# Altium PCB main_pcb_v0.PcbDoc (part 2 of 2)
Units mil, origin at the board's own origin, x right, y up, seen from the top; angles counter-clockwise.
Board outline 8090 x 4600 mil, 2 copper layers (Top Layer, Bottom Layer); 81 components, 148 nets, 565 pads, 37 vias.
Unrouted connection lines stored in the file: 2.
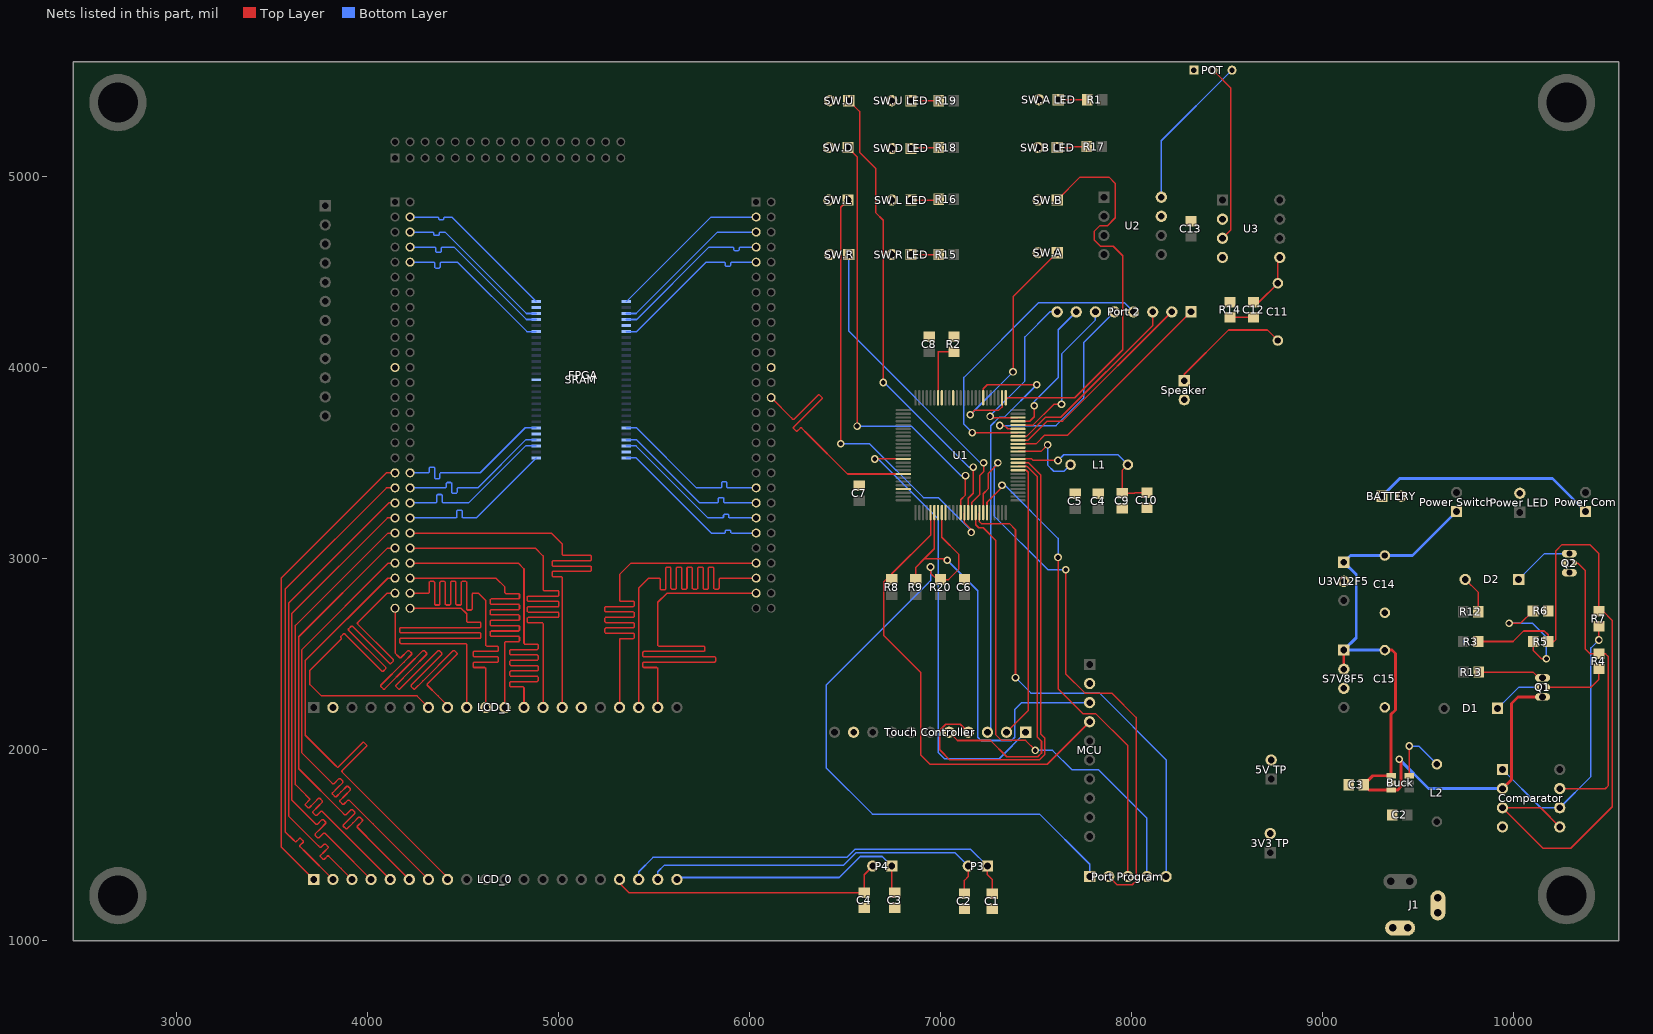
[diagram p2: the nets of this part, all layers, seen from the top]

## Via types
v1: diameter 40, hole 25, Top Layer to Bottom Layer, 37 vias

## Nets (pads, with @x,y where several pads share a name; then routed paths per layer and width w, separated by ;. In a path a pad name is that pad's centre, name@x,y a point inside that pad or via, vN(x,y) a via of type N, cw(c..) or ccw(c..) an arc to the next point about the centre after c; other vN are vias at no path point) (continued)
FPGA_SS: FPGA.116 U1.68 | length 1282.2
  Top Layer w8: FPGA.116@6113.74,3841.34 6220,3735.08 6226.93,3728.15 6232.87,3728.15 6360.25,3855.53 6366.19,3855.53 6380.05,3841.68 6380.05,3835.74 6249.7,3705.38 6230.31,3685.99 6230.31,3680.05 6244.17,3666.19 6250.11,3666.19 6266.53,3682.61 6272.47,3682.61 6305.04,3650.04 6513.51,3441.57 U1.68@6804.8,3441.57
GND: "3V3 TP.2" "5V TP.2" "Power LED.2" "SW.A LED.2" "SW.B LED.2" "SW.D LED.2" "SW.L LED.2" "SW.R LED.2" "SW.U LED.2" "Touch Controller.10" BATTERY.2 Buck.2 C1.1 C2.1 C3.1 C4.1 C5.1 C6.2 C7.1 C8.1 C9.1 C10.1 C13.2 C14.2 C15.2 Comparator.4 FPGA.23 FPGA.112 J1.2 J1.2A J1.2B J1.3 J1.3A J1.3B LCD_1.2 LCD_1.15 MCU.2 POT.1 Q2.3 R2.2 R6.1 R14.1 S7V8F5.3 Speaker.2 SRAM.5 SRAM.26 SRAM.32 SRAM.41 SRAM.53 SW.A.2 SW.B.2 SW.D.2 SW.L.2 SW.R.2 SW.U.2 U1.15 U1.40 U1.43 U1.72 U1.82 U1.84 U2.7 U3.2 U3.4 U3V12F5.2
GREEN0: FPGA.53 LCD_1.7 | length 2486.9
  Top Layer w8: FPGA.53@4145.24,2817.72 4103.35,2817.72 3955.63,2670 3948.7,2663.07 3948.7,2657.13 4136.82,2469.01 4136.82,2463.07 4122.96,2449.21 4117.02,2449.21 3925.93,2640.3 3921.41,2644.82 3915.47,2644.82 3901.61,2630.97 3901.61,2625.03 3906.13,2620.5 4097.22,2429.41 4097.22,2423.47 4083.37,2409.61 4077.43,2409.61 3886.33,2600.7 3881.81,2605.23 3875.87,2605.23 3862.01,2591.37 3862.01,2585.43 3863.56,2583.87 3863.56,2577.93 3700,2414.37 3700,2340 3760,2280 4260,2280 LCD_1.7@4320,2220 LCD_1.7@4305,2220
GREEN1: FPGA.55 LCD_1.8 | length 2473.5
  Top Layer w8: FPGA.55@4145.24,2738.98 4145.24,2504.76 4162.5,2487.5 4169.43,2480.57 4175.37,2480.57 4212.45,2517.65 4218.39,2517.65 4232.25,2503.79 4232.25,2497.85 4192.2,2457.8 4070.55,2336.15 4070.55,2330.21 4084.41,2316.35 4090.35,2316.35 4212,2438 4291.64,2517.65 4297.58,2517.65 4311.44,2503.79 4311.44,2497.85 4231.8,2418.2 4149.74,2336.15 4149.74,2330.21 4163.6,2316.35 4169.54,2316.35 4251.6,2398.4 4370.84,2517.65 4376.78,2517.65 4390.64,2503.79 4390.64,2497.85 4271.39,2378.61 4228.94,2336.15 4228.94,2330.21 4242.8,2316.35 4248.74,2316.35 4291.19,2358.81 4450.03,2517.65 4455.97,2517.65 4469.83,2503.79 4469.83,2497.85 4313.96,2341.98 4313.96,2336.04 4370,2280 4420,2230 LCD_1.8@4420,2220
GREEN2: FPGA.56 LCD_1.9 | length 2471.5
  Top Layer w8: FPGA.56@4223.98,2738.98 4491.02,2738.98 4520,2710 4520,2680 4520,2670.2 4524.2,2666 4590.67,2666 4594.87,2661.8 4594.87,2642.2 4590.67,2638 4520,2638 4174.56,2638 4170.36,2633.8 4170.36,2614.2 4174.56,2610 4520,2610 4590.67,2610 4594.87,2605.8 4594.87,2586.2 4590.67,2582 4520,2582 4174.56,2582 4170.36,2577.8 4170.36,2558.2 4174.56,2554 4515.8,2554 4520,2549.8 4520,2470 LCD_1.9@4520,2220
GREEN3: FPGA.54 LCD_1.10 | length 2471.5
  Top Layer w8: FPGA.54@4223.98,2817.72 4310,2817.72 4319.8,2817.72 4324,2821.92 4324,2875.26 4328.2,2879.46 4347.8,2879.46 4352,2875.26 4352,2817.72 4352,2760.18 4356.2,2755.98 4375.8,2755.98 4380,2760.18 4380,2817.72 4380,2875.26 4384.2,2879.46 4403.8,2879.46 4408,2875.26 4408,2817.72 4408,2760.18 4412.2,2755.98 4431.8,2755.98 4436,2760.18 4436,2817.72 4436,2875.26 4440.2,2879.46 4459.8,2879.46 4464,2875.26 4464,2817.72 4464,2760.18 4468.2,2755.98 4487.8,2755.98 4492,2760.18 4492,2817.72 4492,2875.26 4496.2,2879.46 4515.8,2879.46 4520,2875.26 4520,2817.72 4520,2734.04 4524.2,2729.84 4543.8,2729.84 4548,2734.04 4548,2813.52 4552.2,2817.72 4555,2817.72 4582.28,2817.72 4620,2780 4620,2555 4620,2545.2 4624.2,2541 4681.87,2541 4686.07,2536.8 4686.07,2517.2 4681.87,2513 4620,2513 4558.13,2513 4553.93,2508.8 4553.93,2489.2 4558.13,2485 4620,2485 4681.87,2485 4686.07,2480.8 4686.07,2461.2 4681.87,2457 4620,2457 4558.13,2457 4553.93,2452.8 4553.93,2433.2 4558.13,2429 4615.8,2429 4620,2424.8 4620,2365 LCD_1.10@4620,2220
GREEN4: FPGA.52 LCD_1.11 | length 2471.5
  Top Layer w8: FPGA.52@4223.98,2896.46 4673.54,2896.46 4720,2850 4720,2830 4720,2820.2 4724.2,2816 4792.21,2816 4796.41,2811.8 4796.41,2792.2 4792.21,2788 4720,2788 4647.79,2788 4643.59,2783.8 4643.59,2764.2 4647.79,2760 4720,2760 4792.21,2760 4796.41,2755.8 4796.41,2736.2 4792.21,2732 4720,2732 4647.79,2732 4643.59,2727.8 4643.59,2708.2 4647.79,2704 4720,2704 4792.21,2704 4796.41,2699.8 4796.41,2680.2 4792.21,2676 4720,2676 4647.79,2676 4643.59,2671.8 4643.59,2652.2 4647.79,2648 4720,2648 4792.21,2648 4796.41,2643.8 4796.41,2624.2 4792.21,2620 4720,2620 4647.79,2620 4643.59,2615.8 4643.59,2596.2 4647.79,2592 4720,2592 4792.21,2592 4796.41,2587.8 4796.41,2568.2 4792.21,2564 4724.2,2564 4720,2559.8 4720,2465 LCD_1.11@4720,2220
GREEN5: FPGA.50 LCD_1.12 | length 2471.5
  Top Layer w8: FPGA.50@4223.98,2975.2 4789.8,2975.2 4820,2945 4820,2565 4820,2555.2 4824.2,2551 4889.69,2551 4893.89,2546.8 4893.89,2527.2 4889.69,2523 4820,2523 4750.31,2523 4746.11,2518.8 4746.11,2499.2 4750.31,2495 4820,2495 4889.69,2495 4893.89,2490.8 4893.89,2471.2 4889.69,2467 4820,2467 4750.31,2467 4746.11,2462.8 4746.11,2443.2 4750.31,2439 4820,2439 4889.69,2439 4893.89,2434.8 4893.89,2415.2 4889.69,2411 4820,2411 4750.31,2411 4746.11,2406.8 4746.11,2387.2 4750.31,2383 4820,2383 4889.69,2383 4893.89,2378.8 4893.89,2359.2 4889.69,2355 4820,2355 4750.31,2355 4746.11,2350.8 4746.11,2331.2 4750.31,2327 4815.8,2327 4820,2322.8 4820,2270 LCD_1.12@4820,2220
GREEN6: FPGA.48 LCD_1.13 | length 2467.3
  Top Layer w8: FPGA.48@4223.98,3053.94 4878.7,3053.94 4920,3012.64 4920,2845 4920,2835.2 4924.2,2831 4998.8,2831 5003,2826.8 5003,2807.2 4998.8,2803 4920,2803 4841.2,2803 4837,2798.8 4837,2779.2 4841.2,2775 4920,2775 4998.8,2775 5003,2770.8 5003,2751.2 4998.8,2747 4920,2747 4841.2,2747 4837,2742.8 4837,2723.2 4841.2,2719 4920,2719 4998.8,2719 5003,2714.8 5003,2695.2 4998.8,2691 4920,2691 4841.2,2691 4837,2686.8 4837,2667.2 4841.2,2663 4915.8,2663 4920,2658.8 4920,2460 LCD_1.13@4920,2220
GREEN7: FPGA.46 LCD_1.14 | length 2471.5
  Top Layer w8: FPGA.46@4223.98,3132.68 4962.32,3132.68 5020,3075 5020,3030 5020,3020.2 5024.2,3016 5168.44,3016 5172.64,3011.8 5172.64,2992.2 5168.44,2988 5020,2988 4971.56,2988 4967.36,2983.8 4967.36,2964.2 4971.56,2960 5020,2960 5168.44,2960 5172.64,2955.8 5172.64,2936.2 5168.44,2932 5020,2932 4971.56,2932 4967.36,2927.8 4967.36,2908.2 4971.56,2904 5015.8,2904 5020,2899.8 5020,2735 LCD_1.14@5020,2220
HSYNC: FPGA.139 LCD_1.18 | length 2471.5
  Top Layer w8: LCD_1.18@5420,2220 5420,2845 5471.46,2896.46 5528.8,2896.46 5533,2892.26 5533,2839.36 5537.2,2835.16 5556.8,2835.16 5561,2839.36 5561,2896.46 5561,2949.59 5565.2,2953.79 5584.8,2953.79 5589,2949.59 5589,2896.46 5589,2843.33 5593.2,2839.13 5612.8,2839.13 5617,2843.33 5617,2896.46 5617,2949.59 5621.2,2953.79 5640.8,2953.79 5645,2949.59 5645,2896.46 5645,2843.33 5649.2,2839.13 5668.8,2839.13 5673,2843.33 5673,2896.46 5673,2949.59 5677.2,2953.79 5696.8,2953.79 5701,2949.59 5701,2896.46 5701,2843.33 5705.2,2839.13 5724.8,2839.13 5729,2843.33 5729,2896.46 5729,2949.59 5733.2,2953.79 5752.8,2953.79 5757,2949.59 5757,2896.46 5757,2843.33 5761.2,2839.13 5780.8,2839.13 5785,2843.33 5785,2896.46 5785,2949.59 5789.2,2953.79 5808.8,2953.79 5813,2949.59 5813,2896.46 5813,2843.33 5817.2,2839.13 5836.8,2839.13 5841,2843.33 5841,2892.26 5845.2,2896.46 5855,2896.46 FPGA.139@6035,2896.46
IMU_SCL: MCU.3 R9.1 U1.81 | length 2283.8
  Top Layer w8: R9.1@6870,2889.37 6870,2952.8 6915,2997.8 ; U1.81@6967.2,3239.8 6967.2,3050 6915,2997.8 ; v1@7017.19,2988 7019.19,2990 v1(7035,2990) 7027.2,2997.8 6915,2997.8
  Bottom Layer w8: v1(7035,2990) 7195,2830 7195,2064 7212,2047 7371,2047 7388,2064 7388,2209 7424,2245 MCU.3@7780,2245
IMU_SDA: MCU.4 R8.1 U1.80 | length 2464.6
  Top Layer w8: U1.80@6947.52,3239.8 6947.52,3121.52 6745,2919 R8.1@6745,2889.37 6714.37,2889.37 6702,2877 6702,2596 6897,2401 6897,1970 6944,1923 7558,1923 MCU.4@7780,2145
IO0: FPGA.127 SRAM.22 | length 861.8
  Bottom Layer w8: SRAM.22@5356.22,3683.03 5408.15,3683.03 5722.28,3368.9 5840,3368.9 5849.8,3368.9 5854,3373.1 5854,3396.05 5858.2,3400.25 5877.8,3400.25 5882,3396.05 5882,3373.1 5886.2,3368.9 5925,3368.9 FPGA.127@6035,3368.9
IO1: FPGA.129 SRAM.24 | length 861.8
  Bottom Layer w8: SRAM.24@5356.22,3620.04 5410,3620.04 5739.88,3290.16 5823.2,3290.16 5833,3290.16 5837.2,3294.36 5837.2,3314.05 5841.4,3318.25 5861,3318.25 5865.2,3314.05 5865.2,3294.36 5869.4,3290.16 5925,3290.16 FPGA.129@6035,3290.16
IO2: FPGA.131 SRAM.25 | length 861.8
  Bottom Layer w8: SRAM.25@5356.22,3588.54 5406.42,3588.54 5783.54,3211.42 5850,3211.42 5859.8,3211.42 5864,3215.62 5864,3225.53 5868.2,3229.73 5887.8,3229.73 5892,3225.53 5892,3215.62 5896.2,3211.42 5965,3211.42 FPGA.131@6035,3211.42
IO3: FPGA.133 SRAM.27 | length 861.8
  Bottom Layer w8: SRAM.27@5356.22,3525.55 5407.32,3525.55 5800.19,3132.68 5860,3132.68 5869.8,3132.68 5874,3136.88 5874,3143.53 5878.2,3147.73 5897.8,3147.73 5902,3143.53 5902,3136.88 5906.2,3132.68 5965,3132.68 FPGA.133@6035,3132.68
IO4: FPGA.44 SRAM.28 | length 861.8
  Bottom Layer w8: FPGA.44@4223.98,3211.42 4455,3211.42 4464.8,3211.42 4469,3215.62 4469,3248.06 4473.2,3252.26 4492.8,3252.26 4497,3248.06 4497,3215.62 4501.2,3211.42 4510,3211.42 4569.65,3211.42 SRAM.28@4883.78,3525.55
IO5: FPGA.42 SRAM.30 | length 861.8
  Bottom Layer w8: FPGA.42@4223.98,3290.16 4350,3290.16 4359.8,3290.16 4364,3294.36 4364,3330.06 4368.2,3334.26 4387.8,3334.26 4392,3330.06 4392,3294.36 4396.2,3290.16 4500,3290.16 4530.16,3290.16 4828.54,3588.54 SRAM.30@4883.78,3588.54
IO6: FPGA.40 SRAM.31 | length 861.8
  Bottom Layer w8: FPGA.40@4223.98,3368.9 4400,3368.9 4409.8,3368.9 4414,3373.1 4414,3392.87 4418.2,3397.07 4437.8,3397.07 4442,3392.87 4442,3368.9 4442,3344.92 4446.2,3340.72 4465.8,3340.72 4470,3344.92 4470,3364.7 4474.2,3368.9 4505,3368.9 4577.4,3368.9 4828.54,3620.04 SRAM.31@4883.78,3620.04
IO7: FPGA.38 SRAM.33 | length 861.8
  Bottom Layer w8: FPGA.38@4223.98,3447.64 4309.8,3447.64 4319.6,3447.64 4323.8,3451.84 4323.8,3473.24 4328,3477.44 4347.6,3477.44 4351.8,3473.24 4351.8,3447.64 4351.8,3422.03 4356,3417.83 4375.6,3417.83 4379.8,3422.03 4379.8,3443.44 4384,3447.64 4405,3447.64 4591.57,3447.64 4826.97,3683.03 SRAM.33@4883.78,3683.03
IO8: FPGA.10 SRAM.49 | length 861.8
  Bottom Layer w8: FPGA.10@4223.98,4550 4310,4550 4348.8,4550 4353,4545.8 4353,4523.48 4357.2,4519.28 4376.8,4519.28 4381,4523.48 4381,4545.8 4385.2,4550 4395,4550 4472.49,4550 4835.52,4186.97 SRAM.49@4883.78,4186.97
IO9: FPGA.8 SRAM.51 | length 861.8
  Bottom Layer w8: FPGA.8@4223.98,4628.74 4315,4628.74 4353.8,4628.74 4358,4624.54 4358,4605.48 4362.2,4601.28 4381.8,4601.28 4386,4605.48 4386,4624.54 4390.2,4628.74 4400,4628.74 4453.71,4628.74 4832.49,4249.96 SRAM.51@4883.78,4249.96
IO10: FPGA.6 SRAM.52 | length 861.8
  Bottom Layer w8: FPGA.6@4223.98,4707.48 4305,4707.48 4343.8,4707.48 4348,4703.28 4348,4694.01 4352.2,4689.81 4371.8,4689.81 4376,4694.01 4376,4703.28 4380.2,4707.48 4390,4707.48 4406.46,4707.48 4832.49,4281.46 SRAM.52@4883.78,4281.46
IO11: FPGA.4 SRAM.54 | length 859.7
  Bottom Layer w8: FPGA.4@4223.98,4786.22 4295,4786.22 4368.8,4786.22 4373,4782.02 4373,4777.07 4377.2,4772.87 4396.8,4772.87 4401,4777.07 4401,4782.02 4405.2,4786.22 4415,4786.22 4442.01,4786.22 SRAM.54@4883.78,4344.45
IO12: FPGA.91 SRAM.1 | length 861.8
  Bottom Layer w8: SRAM.1@5356.22,4344.45 5797.99,4786.22 FPGA.91@6035,4786.22
IO13: FPGA.93 SRAM.3 | length 855.2
  Bottom Layer w8: SRAM.3@5356.22,4281.46 5406.46,4281.46 5832.48,4707.48 FPGA.93@6035,4707.48
IO14: FPGA.95 SRAM.4 | length 861.8
  Bottom Layer w8: SRAM.4@5356.22,4249.96 5409.96,4249.96 5788.74,4628.74 5875,4628.74 5913.8,4628.74 5918,4624.54 5918,4614.97 5922.2,4610.77 5941.8,4610.77 5946,4614.97 5946,4624.54 5950.2,4628.74 5960,4628.74 FPGA.95@6035,4628.74
IO15: FPGA.97 SRAM.6 | length 861.8
  Bottom Layer w8: SRAM.6@5356.22,4186.97 5409.96,4186.97 5772.99,4550 5855,4550 5868.8,4550 5873,4545.8 5873,4532.97 5877.2,4528.77 5896.8,4528.77 5901,4532.97 5901,4545.8 5905.2,4550 5915,4550 FPGA.97@6035,4550
NetBuck_6: Buck.6 L2.1 | length 340.2
  Top Layer w8: Buck.6@9452.24,1862.4 v1(9452.24,2018.03)
  Bottom Layer w8: v1(9452.24,2018.03) 9501.61,2018.03 L2.1@9597.24,1922.4
NetC9_2: C9.2 C10.2 L1.2 U1.12 | length 905.9
  Top Layer w8: U1.12@7405.2,3520.31 7476.76,3520.31 7484.7,3512.37 v1(7614.68,3512.37) ; L1.2@7980,3490 7950,3460 C9.2@7950,3340 8013,3340 8016.74,3343.74 C10.2@8080,3343.74
  Bottom Layer w8: v1(7614.68,3512.37) 7644.31,3542 7928,3542 L1.2@7980,3490
NetC11_1: C11.1 C12.2 U3.5 | length 308.1
  Top Layer w8: C12.2@8637.44,4340 8665,4340 C11.1@8765,4440 8765,4565 U3.5@8775,4575
NetC11_2: C11.2 Speaker.1 | length 641.9
  Top Layer w8: Speaker.1@8275,3930 8275,3963 8507,4195 8710,4195 C11.2@8765,4140
NetC12_1: C12.1 R14.2 | length 124.6
  Top Layer w8: R14.2@8515,4260.63 8515,4262 8637.44,4262 C12.1@8637.44,4261.26
NetComparator_1: Comparator.1 Comparator.6 R7.2 | length 1418.4
  Top Layer w8: v1(10445,2573) R7.2@10445,2645.63
  Bottom Layer w8: Comparator.1@9940,1895 10140,1695 Comparator.6@10240,1695 10403,1858 10403,2531 v1(10445,2573)
NetComparator_3: Comparator.3 Comparator.5 R3.1 R5.2 R7.1 | length 3657.6
  Top Layer w8: R3.1@9814.37,2565 9996,2565 10051,2620 10159.37,2620 10179.37,2600 R5.2@10179.37,2565 10209,2565 10220,2576 10220,3040 10252,3072 10397,3072 10445,3024 R7.1@10445,2724.37 10465.63,2724.37 10515,2675 10515,1700 10298,1483 10152,1483 Comparator.3@9940,1695 10140,1695 Comparator.5@10240,1595
NetComparator_7: Comparator.7 Q2.2 R4.1 | length 1583.8
  Top Layer w8: Comparator.7@10240,1795 10478,1795 10495,1812 10495,2485 10480,2500 R4.1@10445,2500 10400,2500 10374,2526 10374,2937 10336,2975 Q2.2@10290,2975
NetD1_2: D1.2 Q1.2 R4.2 | length 646.9
  Top Layer w8: Q1.2@10150,2325 10402,2325 10445,2368 R4.2@10445,2421.26
  Bottom Layer w8: D1.2@9914.76,2215 10024.76,2325 Q1.2@10150,2325
NetD2_1: D2.1 R12.2 | length 198.6
  Top Layer w8: D2.1@9745.24,2890 9814.37,2820.87 R12.2@9814.37,2720
NetD2_2: D2.2 Q2.1 | length 321.2
  Bottom Layer w8: D2.2@10024.76,2890 10159.76,3025 Q2.1@10290,3025
"NetPort 2_1": "Port 2.1" U1.16 | length 1191
  Top Layer w8: U1.16@7405.2,3599.05 7499.07,3599.05 7545.02,3645 7665,3645 8310,4290
"NetPort 2_2": "Port 2.2" U1.17 | length 1082.8
  Top Layer w8: U1.17@7405.2,3618.74 7459,3618.74 7558.48,3718.22 7638.22,3718.22 8210,4290
"NetPort 2_3": "Port 2.3" U1.18 | length 1016.3
  Top Layer w8: U1.18@7405.2,3638.42 7449.42,3638.42 7549.08,3738.08 7629.08,3738.08 8110,4219 8110,4290
"NetPort 2_4": "Port 2.4" U1.19 | length 1616.2
  Top Layer w8: v1(7165.89,3658.11) U1.19@7405.2,3658.11
  Bottom Layer w8: v1(7165.89,3658.11) 7122,3702 7122,3947 7513,4338 7962,4338 8010,4290
"NetPort 2_5": "Port 2.5" U1.20 | length 1118.1
  Top Layer w8: v1(7310,3695) 7334,3695 7351.21,3677.79 U1.20@7405.2,3677.79
  Bottom Layer w8: v1(7310,3695) 7604,3695 7748,3839 7748,4128 7910,4290
"NetPort 2_6": "Port 2.6" U1.21 | length 829.5
  Top Layer w8: U1.21@7405.2,3697.48 7483.93,3697.48 7593.45,3807 v1(7633,3807)
  Bottom Layer w8: v1(7633,3807) 7633,4070 7810,4247 7810,4290
"NetPort 2_7": "Port 2.7" U1.22 | length 734.8
  Top Layer w8: U1.22@7405.2,3717.16 7466.22,3717.16 7490,3740.94 v1(7490,3799)
  Bottom Layer w8: v1(7490,3799) 7490,3821 7616,3947 7616,4196 7710,4290
"NetPort 2_8": "Port 2.8" U1.23 | length 863.4
  Top Layer w8: v1(7259,3743) 7265.15,3736.85 U1.23@7405.2,3736.85
  Bottom Layer w8: v1(7259,3743) 7259,3746 7441,3928 7441,4159 7572,4290 7610,4290
NetPOT_2: POT.2 U3.3 | length 936.3
  Top Layer w8: POT.2@8425,5555 8518,5462 8518,4718 U3.3@8475,4675
NetPOT_3: POT.3 U2.8 | length 818.3
  Bottom Layer w8: U2.8@8155,4890 8155,5185 POT.3@8525,5555
NetQ1_1: Q1.1 R13.1 | length 347.4
  Top Layer w8: R13.1@9815,2405 10100,2405 10130,2375 Q1.1@10150,2375
NetR1_2: "SW.A LED.1" R1.2 | length 151.3
  Top Layer w8: 7615,5400 R1.2@7766.26,5400
NetR2_1: R2.1 U1.44 | length 323.6
  Top Layer w8: U1.44@6986.89,3840.2 6986.89,4080.68 6987,4080.79 R2.1@7070,4080.79
NetR5_1: R5.1 R6.2 | length 622.5
  Top Layer w8: v1(9975,2660) 10035,2660 R6.2@10100,2725 ; R5.1@10100.63,2565 10100.63,2519.37 10145,2475 v1(10170,2475)
  Bottom Layer w8: v1(9975,2660) 10097,2660 10170,2587 v1(10170,2475)
NetR15_2: "SW.R LED.1" R15.2 | length 145
  Top Layer w8: 6845,4590 R15.2@6990,4590
NetR16_2: "SW.L LED.1" R16.2 | length 149.4
  Top Layer w8: 6845,4875 6990.63,4875 R16.2@6990.63,4878.82
NetR17_2: "SW.B LED.1" R17.2 | length 157.1
  Top Layer w8: 7610,5150 7683,5150 7688,5155 R17.2@7765,5155
NetR18_2: "SW.D LED.1" R18.2 | length 148.3
  Top Layer w8: 6845,5145 6850,5150 R18.2@6991.26,5150
NetR19_2: "SW.U LED.1" R19.2 | length 146.3
  Top Layer w8: 6845,5395 R19.2@6991.26,5395
ON/OFF: FPGA.137 LCD_1.17 | length 2471.5
  Top Layer w8: LCD_1.17@5320,2220 5320,2580 5392.47,2580 5396.67,2584.2 5396.67,2603.8 5392.47,2608 5320,2608 5247.53,2608 5243.33,2612.2 5243.33,2631.8 5247.53,2636 5320,2636 5392.47,2636 5396.67,2640.2 5396.67,2659.8 5392.47,2664 5320,2664 5247.53,2664 5243.33,2668.2 5243.33,2687.8 5247.53,2692 5320,2692 5392.47,2692 5396.67,2696.2 5396.67,2715.8 5392.47,2720 5320,2720 5247.53,2720 5243.33,2724.2 5243.33,2743.8 5247.53,2748 5320,2748 5392.47,2748 5396.67,2752.2 5396.67,2771.8 5392.47,2776 5324.2,2776 5320,2780.2 5320,2790 5320,2915 5380.2,2975.2 FPGA.137@6035,2975.2
Power_Common: "Power Com.1" BATTERY.1 | length 1175.2
  Bottom Layer w15: BATTERY.1@9310,3325 9403,3418 10202,3418 10375,3245
RED0: FPGA.37 LCD_0.1 | length 2471.1
  Top Layer w8: LCD_0.1@3720,1320 3550,1490 3550,2897.64 4100,3447.64 FPGA.37@4145.24,3447.64
RED1: FPGA.39 LCD_0.2 | length 2471.5
  Top Layer w8: LCD_0.2@3820,1320 3680,1460 3647.67,1492.33 3647.67,1498.27 3664.39,1514.99 3664.39,1520.93 3650.53,1534.79 3644.59,1534.79 3627.87,1518.07 3621.93,1518.07 3615,1525 3570,1570 3570,2838.9 4100,3368.9 FPGA.39@4145.24,3368.9
RED2: FPGA.41 LCD_0.3 | length 2471.5
  Top Layer w8: LCD_0.3@3920,1320 3862.5,1377.5 3797.47,1442.53 3791.53,1442.53 3774.74,1425.74 3768.8,1425.74 3754.94,1439.6 3754.94,1445.54 3774.7,1465.3 3794.46,1485.06 3794.46,1491 3780.6,1504.86 3774.66,1504.86 3757.87,1488.07 3751.93,1488.07 3745,1495 3588,1652 3588,2765.64 4112.52,3290.16 FPGA.41@4145.24,3290.16
RED3: FPGA.43 LCD_0.4 | length 2471.5
  Top Layer w8: LCD_0.4@4020,1320 3842.5,1497.5 3777.47,1562.53 3771.53,1562.53 3746.43,1537.44 3740.49,1537.44 3726.63,1551.3 3726.63,1557.24 3754.7,1585.3 3782.76,1613.37 3782.76,1619.31 3768.91,1633.17 3762.97,1633.17 3737.87,1608.07 3731.93,1608.07 3725,1615 3605,1735 3605,2711.42 4105,3211.42 FPGA.43@4145.24,3211.42
RED4: FPGA.45 LCD_0.5 | length 2471.5
  Top Layer w8: LCD_0.5@4120,1320 3770,1670 3763.07,1676.93 3757.13,1676.93 3735.36,1655.16 3729.42,1655.16 3715.56,1669.02 3715.56,1674.96 3740.3,1699.7 3765.04,1724.44 3765.04,1730.38 3751.18,1744.24 3745.24,1744.24 3720.5,1719.5 3695.76,1694.76 3689.82,1694.76 3675.96,1708.62 3675.96,1714.56 3697.73,1736.33 3697.73,1742.27 3655,1785 3624,1816 3624,2649 4107.68,3132.68 FPGA.45@4145.24,3132.68
RED5: FPGA.47 LCD_0.6 | length 2471.5
  Top Layer w8: FPGA.47@4145.24,3053.94 4105,3053.94 3641,2589.94 3641,1899 3875,1665 3881.93,1658.07 3887.87,1658.07 3915.51,1685.71 3921.45,1685.71 3935.31,1671.85 3935.31,1665.91 3904.7,1635.3 3874.09,1604.69 3874.09,1598.75 3887.95,1584.89 3893.89,1584.89 3924.5,1615.5 3955.11,1646.11 3961.05,1646.11 3974.91,1632.25 3974.91,1626.32 3947.27,1598.67 3947.27,1592.73 4050,1490 LCD_0.6@4220,1320
RED6: FPGA.49 LCD_0.7 | length 2471.5
  Top Layer w8: FPGA.49@4145.24,2975.2 4110.2,2975.2 3658,2523 3658,1982 3812.5,1827.5 3819.43,1820.57 3825.37,1820.57 3852.36,1847.56 3858.3,1847.56 3872.16,1833.7 3872.16,1827.77 3842.2,1797.8 3817.24,1772.84 3817.24,1766.9 3831.09,1753.04 3837.03,1753.04 3862,1778 3891.96,1807.97 3897.9,1807.97 3911.76,1794.11 3911.76,1788.17 3881.8,1758.2 3856.83,1733.24 3856.83,1727.3 3870.69,1713.44 3876.63,1713.44 3898.63,1735.43 3904.57,1735.43 4030,1610 LCD_0.7@4320,1320
RED7: FPGA.51 LCD_0.8 | length 2473.5
  Top Layer w8: FPGA.51@4145.24,2896.46 4106.46,2896.46 3675,2465 3675,2075 3835,1915 3841.93,1908.07 3847.87,1908.07 3976.58,2036.78 3982.52,2036.78 3996.38,2022.92 3996.38,2016.98 3867.67,1888.27 3867.67,1882.33 3985,1765 4420,1330 LCD_0.8@4420,1320
RST_NMI_N: "Port Program.1" R20.1 U1.83 | length 3478.9
  Top Layer w8: v1(6947.52,2955) 6947.52,2922.48 6980.63,2889.37 R20.1@7000,2889.37 7041.37,2889.37 7096,2944 7096,3020.57 7006.57,3110 U1.83@7006.57,3239.8
  Bottom Layer w8: v1(6947.52,2955) 6947.52,2882.52 6402,2337 6402,1903 6643,1662 7517,1662 7780,1399 7780,1335
SWCLKTCK: "Port Program.3" U1.95 | length 2543.6
  Top Layer w8: U1.95@7242.79,3239.8 7242.79,3293.79 7321.53,3372.53 v1(7321.53,3382.52) ; v1(7614.68,3005) 7614.68,2317.32 7744,2188 7811,2188 7980,2019 7980,1335
  Bottom Layer w8: v1(7321.53,3382.52) 7336.48,3382.52 7614.68,3104.32 v1(7614.68,3005)
SWDIOTMS: "Port Program.2" U1.94 | length 3102.3
  Top Layer w8: U1.94@7223.11,3239.8 7223.11,3338.11 7250,3365 7250,3445 7300,3495 v1(7300,3500) ; v1(7655,2940) 7655,2395 7755,2295 7896,2295 8023,2168 8023,1312 8003,1292 7923,1292 7880,1335
  Bottom Layer w8: v1(7300,3500) 7280,3480 7280,3222 7562,2940 v1(7655,2940)
switch_A: SW.A.1 U1.27 | length 1267.8
  Top Layer w8: v1(7155,3752) 7179,3776 7305.53,3776 7321.53,3792 U1.27@7321.53,3840.2 ; v1(7379,3976) 7379,4369 SW.A.1@7610,4600
  Bottom Layer w8: v1(7155,3752) v1(7379,3976)
switch_B: SW.B.1 U1.26 | length 2123.7
  Top Layer w8: U1.26@7341.22,3840.2 7341.22,3841 7702,3841 7953,4092 7953,4584 7904,4633 7837,4633 7805,4665 7805,4713 7832,4740 7872,4740 7914.53,4782.53 7914.53,4961.86 7881.39,4995 7730,4995 SW.B.1@7610,4875
switch_DOWN: SW.D.1 U1.88 | length 2355.7
  Top Layer w8: SW.D.1@6515,5150 6563,5102 v1(6563,3692) ; U1.88@7105,3239.8 7105,3306.95 7130,3331.95 v1(7130,3433)
  Bottom Layer w8: v1(6563,3692) 6846.05,3692 7105.05,3433 v1(7130,3433)
switch_LEFT: SW.L.1 U1.89 | length 2290.1
  Top Layer w8: v1(6477,3600) 6477,4837 SW.L.1@6515,4875 ; U1.89@7124.68,3239.8 7124.68,3186 7160,3150.68 v1(7160,3136.08)
  Bottom Layer w8: v1(6477,3600) 6628,3600 6910,3318 6988,3318 7160,3146 v1(7160,3136.08)
switch_RIGHT: SW.R.1 U1.91 | length 1702.7
  Top Layer w8: U1.91@7164.05,3239.8 7164.05,3293.77 7204.8,3334.52 7204.8,3433 7225,3453.2 v1(7225,3500.63)
  Bottom Layer w8: SW.R.1@6520,4590 6520,4188 7225,3483 v1(7225,3500.63)
switch_UP: SW.U.1 U1.90 | length 2452.5
  Top Layer w8: SW.U.1@6520,5395 6576,5339 6576,5125 6660,5041 6660,4809.86 6700,4769.86 v1(6700,3920.08) ; U1.90@7144.37,3239.8 7144.37,3314.37 7170.74,3340.74 7170.85,3340.63 v1(7170.85,3477.52)
  Bottom Layer w8: v1(6700,3920.08) 6704.92,3920.08 7147.48,3477.52 v1(7170.85,3477.52)
TDI_ADC14CLK: "Port Program.4" U1.92 | length 2498.1
  Top Layer w8: U1.92@7183.74,3239.8 7183.74,3176.26 7200,3160 7223,3160 7288,3095 7288,2078 7318.53,2047.47 7444.53,2047.47 7495,1997 v1(7495,1995)
  Bottom Layer w8: v1(7495,1995) 7586,1995 7686,1895 7825,1895 8080,1640 8080,1335
TDO_SWO: "Port Program.5" U1.93 | length 2604.9
  Top Layer w8: U1.93@7203.42,3239.8 7203.42,3192 7213.42,3182 7360,3182 7392,3150 v1(7392,2376)
  Bottom Layer w8: v1(7392,2376) 7473,2295 7831,2295 8180,1946 8180,1335
TOUCH_INT: "Touch Controller.3" U1.32 | length 2277.3
  Top Layer w8: U1.32@7223.11,3840.2 7223.11,3888 7244.11,3909 v1(7503,3909)
  Bottom Layer w8: 7245,2090 7262.48,2107.48 7262.48,3694.15 7305.87,3737.54 7331.54,3737.54 v1(7503,3909)
TOUCH_SCL: "Touch Controller.2" U1.9 | length 1465.7
  Top Layer w8: 7345,2090 7458.89,2203.89 7458.89,3450.37 7448,3461.26 U1.9@7405.2,3461.26
TOUCH_SDA/CS: "Touch Controller.1" U1.64 | length 2362.6
  Top Layer w8: v1(6655,3520.31) U1.64@6804.8,3520.31
  Bottom Layer w8: v1(6655,3520.31) 6674,3520.31 6988,3206.31 6988,1984 7020,1952 7307,1952 7445,2090
TOUCH_SDI: "Touch Controller.5" U1.10 | length 2122.8
  Top Layer w8: 7045,2090 7088,2047 7261.47,2047 7346.47,1962 7508.67,1962 7528,1981.33 7528,2043.47 7507,2064.47 7507,3427.37 7456,3478.37 7453.28,3478.37 7450.7,3480.94 U1.10@7405.2,3480.94
TOUCH_SDO: "Touch Controller.4" U1.11 | length 2483.2
  Top Layer w8: 7145,2090 7102.47,2132.53 7027.38,2132.53 6995,2100.14 6995,1998 7048,1945 7515.71,1945 7545,1974.29 7545,2060.47 7524,2081.47 7524,3436 7459.37,3500.63 U1.11@7405.2,3500.63
V_BAT: "Power Switch.1" Buck.1 Buck.3 C3.2@9214.37,1815 C14.1 C15.1 Comparator.2 Q1.3 S7V8F5.1 S7V8F5.2 U3V12F5.1 | length 4011
  Top Layer w15: S7V8F5.2@9110,2420 S7V8F5.1@9110,2520 ; C15.1@9325,2520 9362,2520 9380,2502 9380,2207 9357,2184 Buck.1@9357,1862.4 ; Buck.1@9357.76,1862.4 Buck.1@9357,1862.4 ; v1(9400,1949) 9410,1939 9410,1805.6 9392,1787.6 Buck.3@9357.76,1787.6 9241.77,1787.6 C3.2@9214.37,1815 9261.77,1862.4 Buck.1@9357,1862.4 ; Comparator.2@9940,1795 9987,1842 9987,2240 10022,2275 Q1.3@10150,2275
  Bottom Layer w15: C15.1@9325,2520 S7V8F5.1@9110,2520 9175,2585 9175,2915 U3V12F5.1@9110,2980 9145,3015 C14.1@9325,3015 9470,3015 9700,3245 ; v1(9400,1949) 9554,1795 Comparator.2@9940,1795
VSW: L1.1 U1.14 | length 422.4
  Top Layer w8: U1.14@7405.2,3559.68 7525.68,3559.68 v1(7560,3594)
  Bottom Layer w8: v1(7560,3594) 7560,3488 7592,3456 7646,3456 L1.1@7680,3490
VSYNC: FPGA.141 LCD_1.19 | length 2471.5
  Top Layer w8: LCD_1.19@5520,2220 5520,2310 5520,2424.8 5515.8,2429 5446.17,2429 5441.97,2433.2 5441.97,2452.8 5446.17,2457 5520,2457 5818.6,2457 5822.8,2461.2 5822.8,2480.8 5818.6,2485 5520,2485 5446.17,2485 5441.97,2489.2 5441.97,2508.8 5446.17,2513 5520,2513 5762.6,2513 5766.8,2517.2 5766.8,2536.8 5762.6,2541 5524.2,2541 5520,2545.2 5520,2555 5520,2770 5567.72,2817.72 FPGA.141@6035,2817.72
XL: C2.2@7125,1245 LCD_0.19 P3.2 | length 1902.8
  Top Layer w8: C2.2@7125,1245 7125,1315 7145,1335 P3.2@7145,1390
  Bottom Layer w8: LCD_0.19@5510,1310 LCD_0.19@5520,1320 5520,1360 5555,1395 6493,1395 6558,1460 7075,1460 P3.2@7145,1390
XR: C4.2@6600,1250 LCD_0.17 P4.2 | length 1479.4
  Top Layer w8: LCD_0.17@5320,1320 5320,1300 5370,1250 C4.2@6600,1250 6600,1345 P4.2@6645,1390
YD: C1.2 LCD_0.18 P3.1 | length 2104.9
  Top Layer w8: P3.1@7245,1390 7245,1345 7270,1320 C1.2@7270,1245
  Bottom Layer w8: LCD_0.18@5420,1320 5420,1360 5495,1435 6508.96,1435 6550.96,1477 7158,1477 P3.1@7245,1390
YU: C3.2@6760,1249.37 LCD_0.20 P4.1 | length 1342.3
  Top Layer w8: P4.1@6745,1390 6745,1264.37 C3.2@6760,1249.37
  Bottom Layer w8: LCD_0.20@5620,1320 5630,1330 6470,1330 6580,1440 6695,1440 P4.1@6745,1390
pads on no net: "Power Com.2" "Power Switch.2" "Touch Controller.7" "Touch Controller.8" "Touch Controller.9" Buck.5 FPGA.25 FPGA.27 FPGA.29 FPGA.31 FPGA.33 FPGA.35 FPGA.57 FPGA.58 FPGA.59 FPGA.60 FPGA.61 FPGA.62 FPGA.63 FPGA.64 FPGA.65 FPGA.66 FPGA.67 FPGA.68 FPGA.69 FPGA.70 FPGA.71 FPGA.72 FPGA.73 FPGA.74 FPGA.75 FPGA.76 FPGA.77 FPGA.78 FPGA.79 FPGA.80 FPGA.81 FPGA.82 FPGA.83 FPGA.84 FPGA.85 FPGA.86 FPGA.87 FPGA.88 FPGA.89 FPGA.90 FPGA.92 FPGA.94 FPGA.96 FPGA.98 FPGA.100 FPGA.102 FPGA.104 FPGA.106 FPGA.108 FPGA.110 FPGA.114 FPGA.124 FPGA.126 FPGA.128 LCD_1.3 LCD_1.4 LCD_1.5 LCD_1.6 MCU.5 MCU.6 MCU.7 MCU.8 MCU.9 MCU.10 SRAM.16 SRAM.40 SRAM.43 U1.1 U1.2 U1.3 U1.4 U1.5 U1.6 U1.7 U1.8 U1.24 U1.25 U1.28 U1.29 U1.30 U1.31 U1.33 U1.34 U1.35 U1.39 U1.41 U1.42 U1.46 U1.47 U1.48 U1.49 U1.50 U1.51 U1.52 U1.53 U1.54 U1.55 U1.56 U1.57 U1.58 U1.59 U1.60 U1.61 U1.62 U1.63 U1.65 U1.66 U1.67 U1.69 U1.70 U1.71 U1.74 U1.75 U1.76 U1.85 U1.86 U1.96 U1.97 U1.98 U1.99 U1.100 U2.5 U3.1 U3.7 U3.8

## Polygon pours and split planes (outlines as drawn)
GND on Top Layer (solid, pour order 10): 2460,1000 2460,5600 10550,5600 10550,1000
GND on Bottom Layer (solid, pour order 12): 2460,1000 2460,5600 10550,5600 10550,1010 2470,1010

## Keep-outs
Keep-Out Layer:
  the board outline again, w10

## Silkscreen, mask and mechanical layers (free items; w line width, h text height)
Top Overlay:
  lines w10: 7730,1495 8375,1495 8375,2475 8375,2495 7730,2495 ; 9060,2170 9055,2175 8510,2175 8510,2570 9060,2570 ; 9060,2730 8620,2730 8620,3030 9060,3030 ; 6395,1340 6395,2140 7495,2140 7495,1340 6395,1340
  text "Doodle Boy v2.0" at 2530,4935 h60
  text "Really / Awesome / Men /  /  / Evan Waxman / Chris Critelli" at 2525,1585 h60
Bottom Overlay:
  lines w10: 2995,1270 2995,5315 9545,5315 9545,1270 2995,1270
  text "LCD SCREEN" at 2985,1240 h60 r180
Mechanical 22:
  text "G1" at 3118.99,5839.68 h34 r90
  text "LK" at 2618.99,5828.35 h34 r90
  text "LA" at 2718.99,5828.35 h34 r90
  text "G0" at 3018.99,5828.35 h34 r90
  text "G2" at 3218.99,5828.35 h34 r90
  text "G3" at 3318.99,5828.35 h34 r90
  text "G4" at 3418.99,5828.35 h34 r90
  text "G5" at 3518.99,5828.35 h34 r90
  text "G6" at 3618.99,5828.35 h34 r90
  text "G7" at 3718.99,5828.35 h34 r90
  text "DE" at 4318.99,5828.35 h34 r90
  text "GND" at 2518.99,5794.36 h34 r90
  text "PWM" at 2818.99,5794.36 h34 r90
  text "GND" at 3818.99,5794.36 h34 r90
  text "CLK" at 3918.99,5794.36 h34 r90
  text "5VIN" at 2418.99,5766.04 h34 r90
  text "3.3V" at 2918.99,5766.04 h34 r90
  text "HSYNC" at 4118.99,5726.38 h34 r90
  text "VSYNC" at 4218.99,5726.38 h34 r90
  text "ON/!OFF" at 4024.65,5681.07 h34 r90
  text "40-Pin TFT Breakout" at 3043.98,5628.66 h42.5
  text "w/LED Boost &" at 3204.36,5296.16 h42.5
  text "4-Wire Touchscreen" at 3098.14,5221.16 h42.5
  text "R0" at 2425,5105 h34 r90
  text "R1" at 2525,5105 h34 r90
  text "R2" at 2625,5105 h34 r90
  text "R3" at 2725,5105 h34 r90
  text "R4" at 2825,5105 h34 r90
  text "R5" at 2925,5105 h34 r90
  text "R6" at 3025,5105 h34 r90
  text "R7" at 3125,5105 h34 r90
  text "B0" at 3225,5105 h34 r90
  text "B1" at 3325,5105 h34 r90
  text "B2" at 3425,5105 h34 r90
  text "B3" at 3525,5105 h34 r90
  text "B4" at 3625,5105 h34 r90
  text "B5" at 3725,5105 h34 r90
  text "B6" at 3825,5105 h34 r90
  text "B7" at 3925,5105 h34 r90
  text "XR" at 4025,5105 h34 r90
  text "YD" at 4125,5105 h34 r90
  text "XL" at 4225,5105 h34 r90
  text "YU" at 4325,5105 h34 r90
  text "G1" at 2921.63,4114.68 h34 r90
  text "LK" at 2421.63,4103.35 h34 r90
  text "LA" at 2521.63,4103.35 h34 r90
  text "G0" at 2821.63,4103.35 h34 r90
  text "G2" at 3021.63,4103.35 h34 r90
  text "G3" at 3121.63,4103.35 h34 r90
  text "G4" at 3221.63,4103.35 h34 r90
  text "G5" at 3321.63,4103.35 h34 r90
  text "G6" at 3421.63,4103.35 h34 r90
  text "G7" at 3521.63,4103.35 h34 r90
  text "DE" at 4121.63,4103.35 h34 r90
  text "GND" at 2321.63,4069.36 h34 r90
  text "PWM" at 2621.63,4069.36 h34 r90
  text "GND" at 3621.63,4069.36 h34 r90
  text "CLK" at 3721.63,4069.36 h34 r90
  text "5VIN" at 2221.63,4041.04 h34 r90
  text "3.3V" at 2721.63,4041.04 h34 r90
  text "HSYNC" at 3921.63,4001.38 h34 r90
  text "VSYNC" at 4021.63,4001.38 h34 r90
  text "ON/!OFF" at 3827.29,3956.07 h34 r90
  text "40-Pin TFT Breakout" at 2846.62,3903.66 h42.5
  text "G1" at 4452.57,3799.68 h34 r90
  text "LK" at 3952.57,3788.35 h34 r90
  text "LA" at 4052.57,3788.35 h34 r90
  text "G0" at 4352.57,3788.35 h34 r90
  text "G2" at 4552.57,3788.35 h34 r90
  text "G3" at 4652.57,3788.35 h34 r90
  text "G4" at 4752.57,3788.35 h34 r90
  text "G5" at 4852.57,3788.35 h34 r90
  text "G6" at 4952.57,3788.35 h34 r90
  text "G7" at 5052.57,3788.35 h34 r90
  text "DE" at 5652.57,3788.35 h34 r90
  text "GND" at 3852.57,3754.36 h34 r90
  text "PWM" at 4152.57,3754.36 h34 r90
  text "GND" at 5152.57,3754.36 h34 r90
  text "CLK" at 5252.57,3754.36 h34 r90
  text "5VIN" at 3752.57,3726.04 h34 r90
  text "3.3V" at 4252.57,3726.04 h34 r90
  text "HSYNC" at 5452.57,3686.38 h34 r90
  text "VSYNC" at 5552.57,3686.38 h34 r90
  text "ON/!OFF" at 5358.23,3641.07 h34 r90
  text "40-Pin TFT Breakout" at 4377.56,3588.66 h42.5
  text "w/LED Boost &" at 3007,3571.16 h42.5
  text "4-Wire Touchscreen" at 2900.78,3496.16 h42.5
  text "R0" at 2227.64,3380 h34 r90
  text "R1" at 2327.64,3380 h34 r90
  text "R2" at 2427.64,3380 h34 r90
  text "R3" at 2527.64,3380 h34 r90
  text "R4" at 2627.64,3380 h34 r90
  text "R5" at 2727.64,3380 h34 r90
  text "R6" at 2827.64,3380 h34 r90
  text "R7" at 2927.64,3380 h34 r90
  text "B0" at 3027.64,3380 h34 r90
  text "B1" at 3127.64,3380 h34 r90
  text "B2" at 3227.64,3380 h34 r90
  text "B3" at 3327.64,3380 h34 r90
  text "B4" at 3427.64,3380 h34 r90
  text "B5" at 3527.64,3380 h34 r90
  text "B6" at 3627.64,3380 h34 r90
  text "B7" at 3727.64,3380 h34 r90
  text "XR" at 3827.64,3380 h34 r90
  text "YD" at 3927.64,3380 h34 r90
  text "XL" at 4027.64,3380 h34 r90
  text "YU" at 4127.64,3380 h34 r90
  text "w/LED Boost &" at 4537.94,3256.16 h42.5
  text "4-Wire Touchscreen" at 4431.72,3181.16 h42.5
  text "R0" at 3758.58,3065 h34 r90
  text "R1" at 3858.58,3065 h34 r90
  text "R2" at 3958.58,3065 h34 r90
  text "R3" at 4058.58,3065 h34 r90
  text "R4" at 4158.58,3065 h34 r90
  text "R5" at 4258.58,3065 h34 r90
  text "R6" at 4358.58,3065 h34 r90
  text "R7" at 4458.58,3065 h34 r90
  text "B0" at 4558.58,3065 h34 r90
  text "B1" at 4658.58,3065 h34 r90
  text "B2" at 4758.58,3065 h34 r90
  text "B3" at 4858.58,3065 h34 r90
  text "B4" at 4958.58,3065 h34 r90
  text "B5" at 5058.58,3065 h34 r90
  text "B6" at 5158.58,3065 h34 r90
  text "B7" at 5258.58,3065 h34 r90
  text "XR" at 5358.58,3065 h34 r90
  text "YD" at 5458.58,3065 h34 r90
  text "XL" at 5558.58,3065 h34 r90
  text "YU" at 5658.58,3065 h34 r90
Mechanical 23:
  text "+25mA" at 3073.62,5831.01 h34
  text "+25mA" at 3073.62,5741.01 h34
  text "Backlight: 24V max CC" at 3918.97,5713.93 h34
  text "25mA-125mA w/jumpers" at 3910.47,5653.93 h34
  text "+50mA" at 3073.62,5651.01 h34
  text "+25mA" at 2876.26,4106.01 h34
  text "+25mA" at 2876.26,4016.01 h34
  text "Backlight: 24V max CC" at 3721.61,3988.93 h34
  text "25mA-125mA w/jumpers" at 3713.11,3928.93 h34
  text "+50mA" at 2876.26,3926.01 h34
  text "+25mA" at 4407.2,3791.01 h34
  text "+25mA" at 4407.2,3701.01 h34
  text "Backlight: 24V max CC" at 5252.55,3673.93 h34
  text "25mA-125mA w/jumpers" at 5244.05,3613.93 h34
  text "+50mA" at 4407.2,3611.01 h34

## Text inside footprints (layer, text, board x,y; h text height)
J1: Mechanical 1 "Alert PCB fab to slot details" at 9166.18,781.89 h11.81 r90; Mechanical 1 "Assign keep-out area to slot" at 9146.5,781.89 h11.81 r90; Mechanical 1 "Mech 1 - Slot cut-out" at 9185.87,781.89 h11.81 r90; Mechanical 1 "Mech 2 - Clearance, move to internal plane if present" at 9205.55,781.89 h11.81 r90
Q2: Top Overlay "3" at 10379.57,2895.47 h59.06; Top Overlay "1" at 10392.99,2995.47 h59.06